# Altium PCB LNA.PcbDoc
Units mm, origin at the board's own origin, x right, y up, seen from the top; angles counter-clockwise.
Board outline 80 x 40 mm, 2 copper layers (Top Layer, Bottom Layer), stack 1.571 mm thick; 12 components, 10 nets, 39 pads, 0 vias.
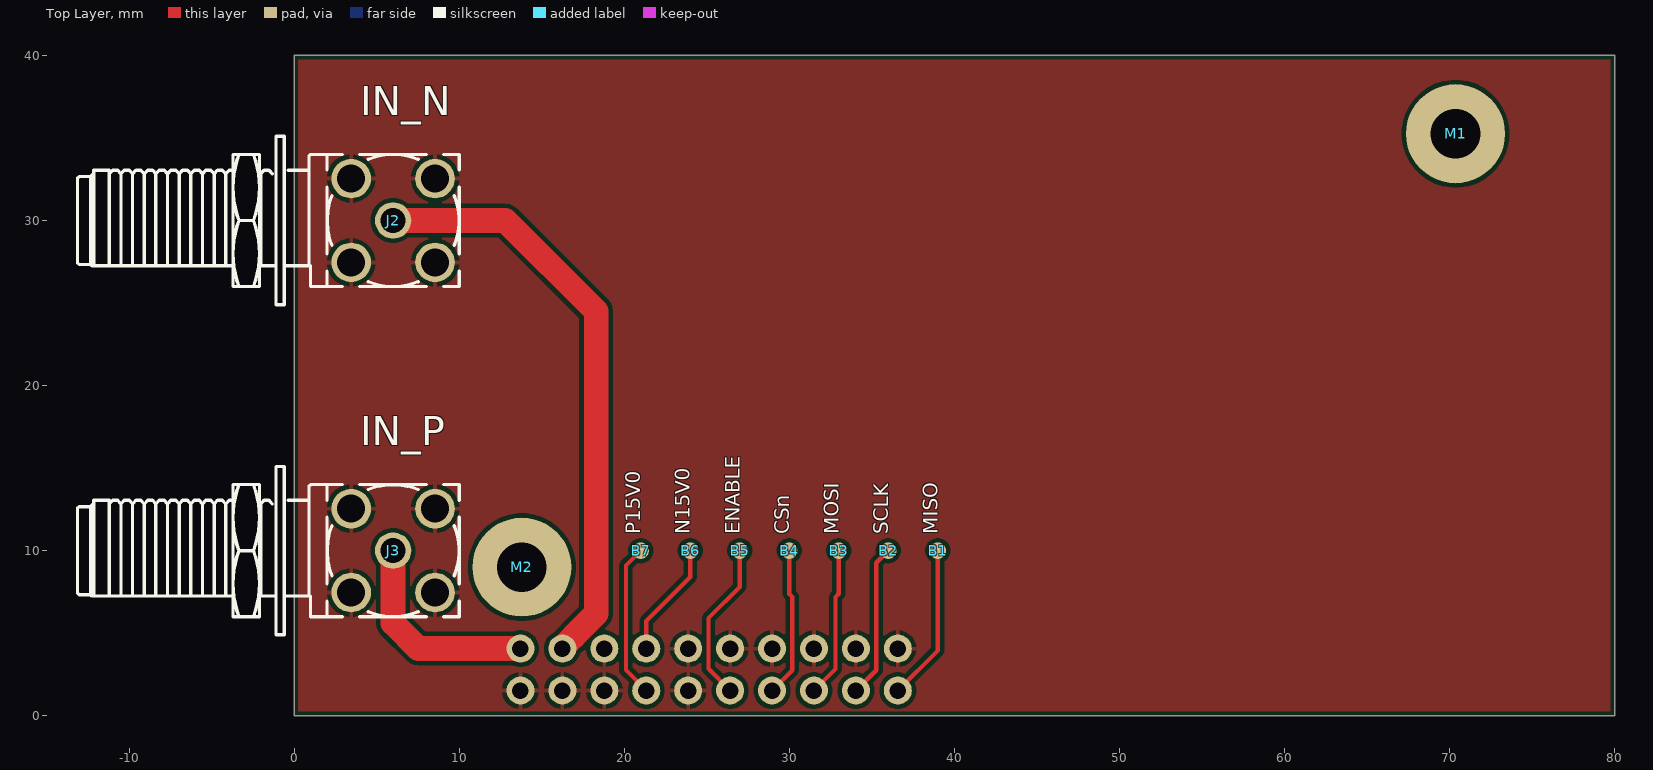
[diagram p0: Top Layer view]
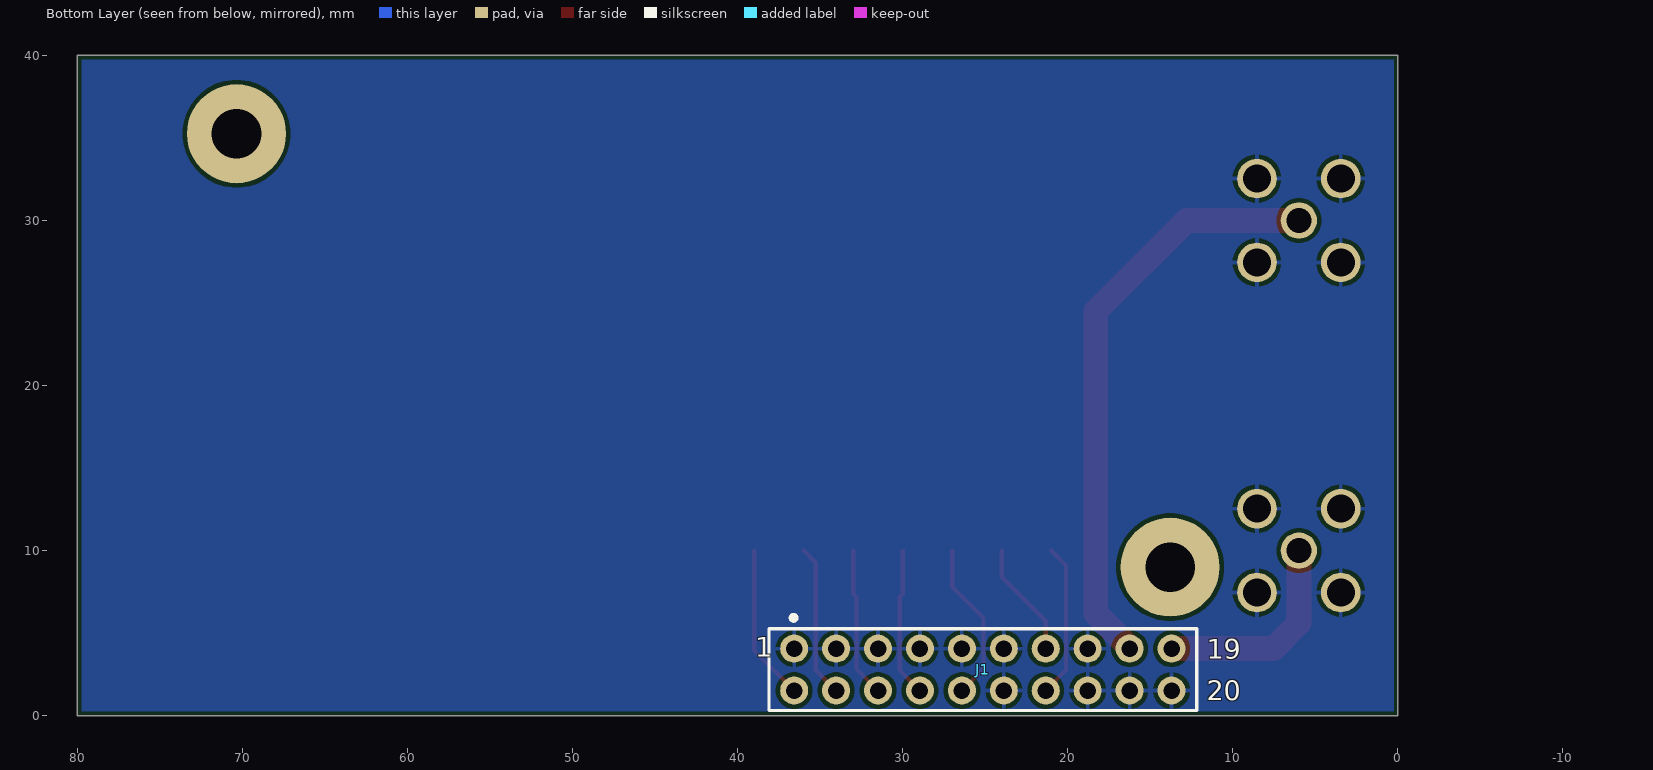
[diagram p1: Bottom Layer view, seen from below]

## Layer stack, top to bottom
Top Solder: solder mask 0.0102, Solder Resist, Dk 3.5
Top Layer: signal copper 0.0356
Dielectric 1: dielectric 1.5, FR-4, Dk 4.8
Bottom Layer: signal copper 0.0356
Bottom Solder: solder mask 0.0102, Solder Resist, Dk 3.5

## Board outline
0,0 80,0 80,40 0,40

## Design rules (kind name [scope] priority, off if disabled: settings)
BoardOutlineClearance [All] p1: gap=0.254 ignorepadtopadclearanceinfootprint=FALSE except(0: Arc-SplitContinuation Track-SplitContinuation SMDPad-SplitContinuation THPad-SplitContinuation Via-SplitContinuation Fill-SplitContinuation Poly-SplitContinuation Region-SplitContinuation Text-SplitContinuation)
Clearance [All] p1: gap=0.254 ignorepadtopadclearanceinfootprint=FALSE
PolygonConnect [All] p1: connectstyle=Relief reliefconductorwidth=0.254 reliefentries=4 polygonreliefangle="90 Angle" airgapwidth=0.254
RoutingVias [All] p1: holewidth=0.711 width=1.27 viastyle="Through Hole" minholewidth=0.711 minwidth=1.27 maxholewidth=0.711 maxwidth=1.27
SolderMaskExpansion [All] p1: expansion=0.102 istentingtop=FALSE
SupplyNets "Schematic Supply Nets_2" [InNet('P15V0')] p1: voltage=0.000
SupplyNets "Schematic Supply Nets_1" [InNet('N15V0')] p2: voltage=0.000
SupplyNets "Schematic Supply Nets" [InNet('GND')] p3: voltage=0.000
Width [All] p1: maxlimit=3 minlimit=0.254 preferedwidth=0.254
30 further rules are at their usual default settings.

## Components (designator, comment, footprint, x,y, rotation, side; value= is the part's Value field where it differs from the comment)
B1 "SMD Pad" C100 39,10 r0 top
B2 "SMD Pad" C100 36,10 r0 top
B3 "SMD Pad" C100 33,10 r0 top
B4 "SMD Pad" C100 30,10 r0 top
B5 "SMD Pad" C100 27,10 r0 top
B6 "SMD Pad" C100 24,10 r0 top
B7 "SMD Pad" C100 21,10 r0 top
J1 "Socket 20" SAMTEC_SSW-110-01-G-D 25.146,2.794 r180 bottom
J2 "SMA" AMPHENOL_132203-12 6,30 r180 top
J3 "SMA" AMPHENOL_132203-12 6,10 r180 top
M1 "Plated Hole" MTG300_600 70.364,35.256 r0 top
M2 "Plated Hole" MTG300_600 13.8,9 r0 top

## Footprints (in the part's own frame and the unit in brackets; to place one, negate y for a bottom-side part, rotate by r counter-clockwise, add the part's x,y. Pads: shape width x height; smd on the part's side, far side on the other; paste and mask are expansions set on the pad)
AMPHENOL_132203-12 [mm] "50 Ohm Through Hole SMA Right Angle PCB Jack"
  round 2.2 hole 1.5: 1(0,0)
  round 2.4 hole 1.7: 2(-2.54,2.54) 2(-2.54,-2.54) 2(2.54,2.54) 2(2.54,-2.54)
  silkscreen extent -4,-5.1 19.12,5.1, body extent -4,-5.1 19.05,5.1, height 11.45
C100 [mm] "1mm Diameter SMD Pad"
  round 1 smd paste-0.5: 1(0,0)
MTG300_600 [mm] "Plated Through Hole: Hole Dia.=3.0mm Pad Dia.=6.0mm"
  round 6 hole 3: 1(0,0)
SAMTEC_SSW-110-01-G-D [mm] "20 Contacts, Pitch 2.54mm, Double Row Through Mount Straight Socket (Lead Length 2.64mm)"
  round 1.7 hole 1: 1(-11.43,1.27) 2(-11.43,-1.27) 3(-8.89,1.27) 4(-8.89,-1.27) 5(-6.35,1.27) 6(-6.35,-1.27) 7(-3.81,1.27) 8(-3.81,-1.27) 9(-1.27,1.27) 10(-1.27,-1.27) 11(1.27,1.27) 12(1.27,-1.27) 13(3.81,1.27) 14(3.81,-1.27) 15(6.35,1.27) 16(6.35,-1.27) 17(8.89,1.27) 18(8.89,-1.27) 19(11.43,1.27) 20(11.43,-1.27)
  silkscreen extent -12.95,-2.48 12.95,3.28, body extent -12.95,-2.48 12.95,2.48, height 8.51

## Part data
B1 B2 B3 B4 B5 B6 B7: library part SMD_PAD_D1MM, "Pad", Author="CERN DEM JLC", Component Type="Standard (No BOM)", ComponentHeight=0mm, CreateDate=10/10/2017, Family="SMD Pad", HelpURL=Undefined, LatestRevisionDate=10/10/2017, Mounted=No, PackageDescription="1mm Diameter SMD Pad", Part Description="1mm Diameter SMD Pad", Part Number=SMD_PAD_D1MM, Pin Count=1, Sense=No, SMD=Yes, Socket=No, Status=None
J1: library part SAMTEC_SSW-110-01-G-D, "Connector 20 Female", Manufacturer=SAMTEC, Manufacturer Part Number=SSW-110-01-G-D, Author="CERN DEM JLC", Component Type=Standard, ComponentHeight=8.51mm, CreateDate=7/19/2017, Family="Socket 20", HelpURL=\\cern.ch\dfs\Applications\Altium\Datasheets\SAMTEC_SSW-110-01-G-D.pdf, LatestRevisionDate=7/19/2017, Mounted=Yes, Part Description="20 Contacts, Pitch 2.54mm, Dual Row Through Mount Straight Socket (Lead Length 2.64mm)", Part Number=SAMTEC_SSW-110-01-G-D, Pin Count=20, PressFit=No, Sense=No, SMD=No, Socket=No, Status=None
J2 J3: library part 132203-12, "RF Connector SMA Right Angle PCB Jack Through Hole 50 Ohm Bulkhead", Manufacturer="Amphenol Connex", Supplier Part Number=523-132203-12, Category="RF / Coaxial Connectors", ComponentLink1Description=https://datasheet.ciiva.com/24241/132203-12-customer-drawing-24241088.pdf?src-supplier=Mouser, ComponentLink1URL=https://datasheet.ciiva.com/24241/132203-12-customer-drawing-24241088.pdf?src-supplier=Mouser, ComponentLink2Description=https://datasheet.ciiva.com/647/132203-12-647032.pdf?src-supplier=Digikey, ComponentLink2URL=https://datasheet.ciiva.com/647/132203-12-647032.pdf?src-supplier=Digikey, Manufacturer Part Number=132203-12, Pricing="1=20.22, 10=18.65, 50=18.65, 100=18.65, 1000=18.65, 10000=18.65 (USD)", RoHS=Yes, Stock=515, Supplier=Mouser
M1 M2: library part PLATED_HOLE3.0_PAD6.0, "Single Terminal Socket", Author="CERN DEM JLC", Component Type="Standard (No BOM)", ComponentHeight=0mm, CreateDate=26.05.2008, Family="Plated Hole", LatestRevisionDate=26.05.2008, Mounted=No, PackageDescription="Plated Through Hole: Hole Dia.=3.0mm Pad Dia.=6.0mm", Part Description="Plated Through Hole: Hole Dia.=3.0mm Pad Dia.=6.0mm", Part Number=PLATED_HOLE3.0_PAD6.0, Pin Count=1, SMD=No, Socket=No, Status=None, Table=Pads

## Nets (pads, with @x,y where several pads share a name; then routed paths per layer and width w, separated by ;. In a path a pad name is that pad's centre, name@x,y a point inside that pad or via, vN(x,y) a via of type N, cw(c..) or ccw(c..) an arc to the next point about the centre after c; other vN are vias at no path point)
GND: J1.1 J1.3 J1.5 J1.7 J1.9 J1.11 J1.12 J1.15 J1.16 J1.18 J1.20 J2.2 J3.2
LNA_CLK: B2.1 J1.4 | length 9.3
  Top Layer w0.254: J1.4 35.267,2.755 35.267,9.267 B2.1
LNA_CSN: B4.1 J1.8 | length 9.1
  Top Layer w0.254: J1.8 30.187,2.755 30.187,7.193 30,7.38 B4.1
LNA_EN: B5.1 J1.10 | length 9.8
  Top Layer w0.254: J1.10 25.1,2.84 25.1,3.547 25.107,3.554 25.107,5.907 27,7.8 B5.1
LNA_MISO: B1.1 J1.2 | length 9.5
  Top Layer w0.254: J1.2 39,3.948 B1.1
LNA_MOSI: B3.1 J1.6 | length 9.1
  Top Layer w0.254: J1.6 32.805,2.833 32.805,7.189 33,7.384 B3.1
LNA_OUT_N: J1.17 J2.1 | length 35.9
  Top Layer w1.5: J2.1 12.8,30 18.3,24.5 18.3,6.19 16.942,4.832 16.942,4.804 16.256,4.118 J1.17
LNA_OUT_P: J1.19 J3.1 | length 12.8
  Top Layer w1.5: J3.1 6,5.6 7.536,4.064 J1.19
N15V0: B6.1 J1.13 | length 7
  Top Layer w0.254: J1.13 21.336,5.736 24,8.4 B6.1
P15V0: B7.1 J1.14 | length 9.4
  Top Layer w0.254: B7.1 20.1,9.1 20.1,2.76 J1.14
pads on no net: M1.1 M2.1

## Polygon pours and split planes (outlines as drawn)
GND on Top Layer "GND_L01_P001" (solid, pour order 1): 0,0 80,0 80,40 0,40
GND on Bottom Layer "GND_L02_P000" (solid, pour order 0): 0,0 80,0 80,40 0,40

## Silkscreen, mask and mechanical layers (free items; w line width, h text height)
Top Overlay:
  text "IN_N" at 4,35.804 h3
  text "IN_P" at 4,15.804 h3
  text "P15V0" at 21.288,11 h1.5 r90
  text "N15V0" at 24.288,11 h1.5 r90
  text "ENABLE" at 27.3,11 h1.5 r90
  text "CSn" at 30.288,11 h1.5 r90
  text "MOSI" at 33.288,11 h1.5 r90
  text "SCLK" at 36.288,11 h1.5 r90
  text "MISO" at 39.288,11 h1.5 r90
Mechanical 1:
  circle w0.254: c70.364,35.256 r2.5
  lines w0.1: 0,0 0,40 80,40 80,0 0,0

## Text inside footprints (layer, text, board x,y; h text height)
J1: Bottom Overlay "20" at 11.576,0.924 h1.2; Bottom Overlay "19" at 11.576,3.464 h1.2; Bottom Overlay "1" at 38.923,3.566 h1.2; Mechanical 14 "1" at 38.923,3.566 h1.2